# Altium PCB aig2_power.PcbDoc
Units mm, origin at the board's own origin, x right, y up, seen from the top; angles counter-clockwise.
Board outline 80 x 80 mm, 2 copper layers (Top Layer, Bottom Layer), stack 1.571 mm thick; 62 components, 47 nets, 339 pads, 70 vias.
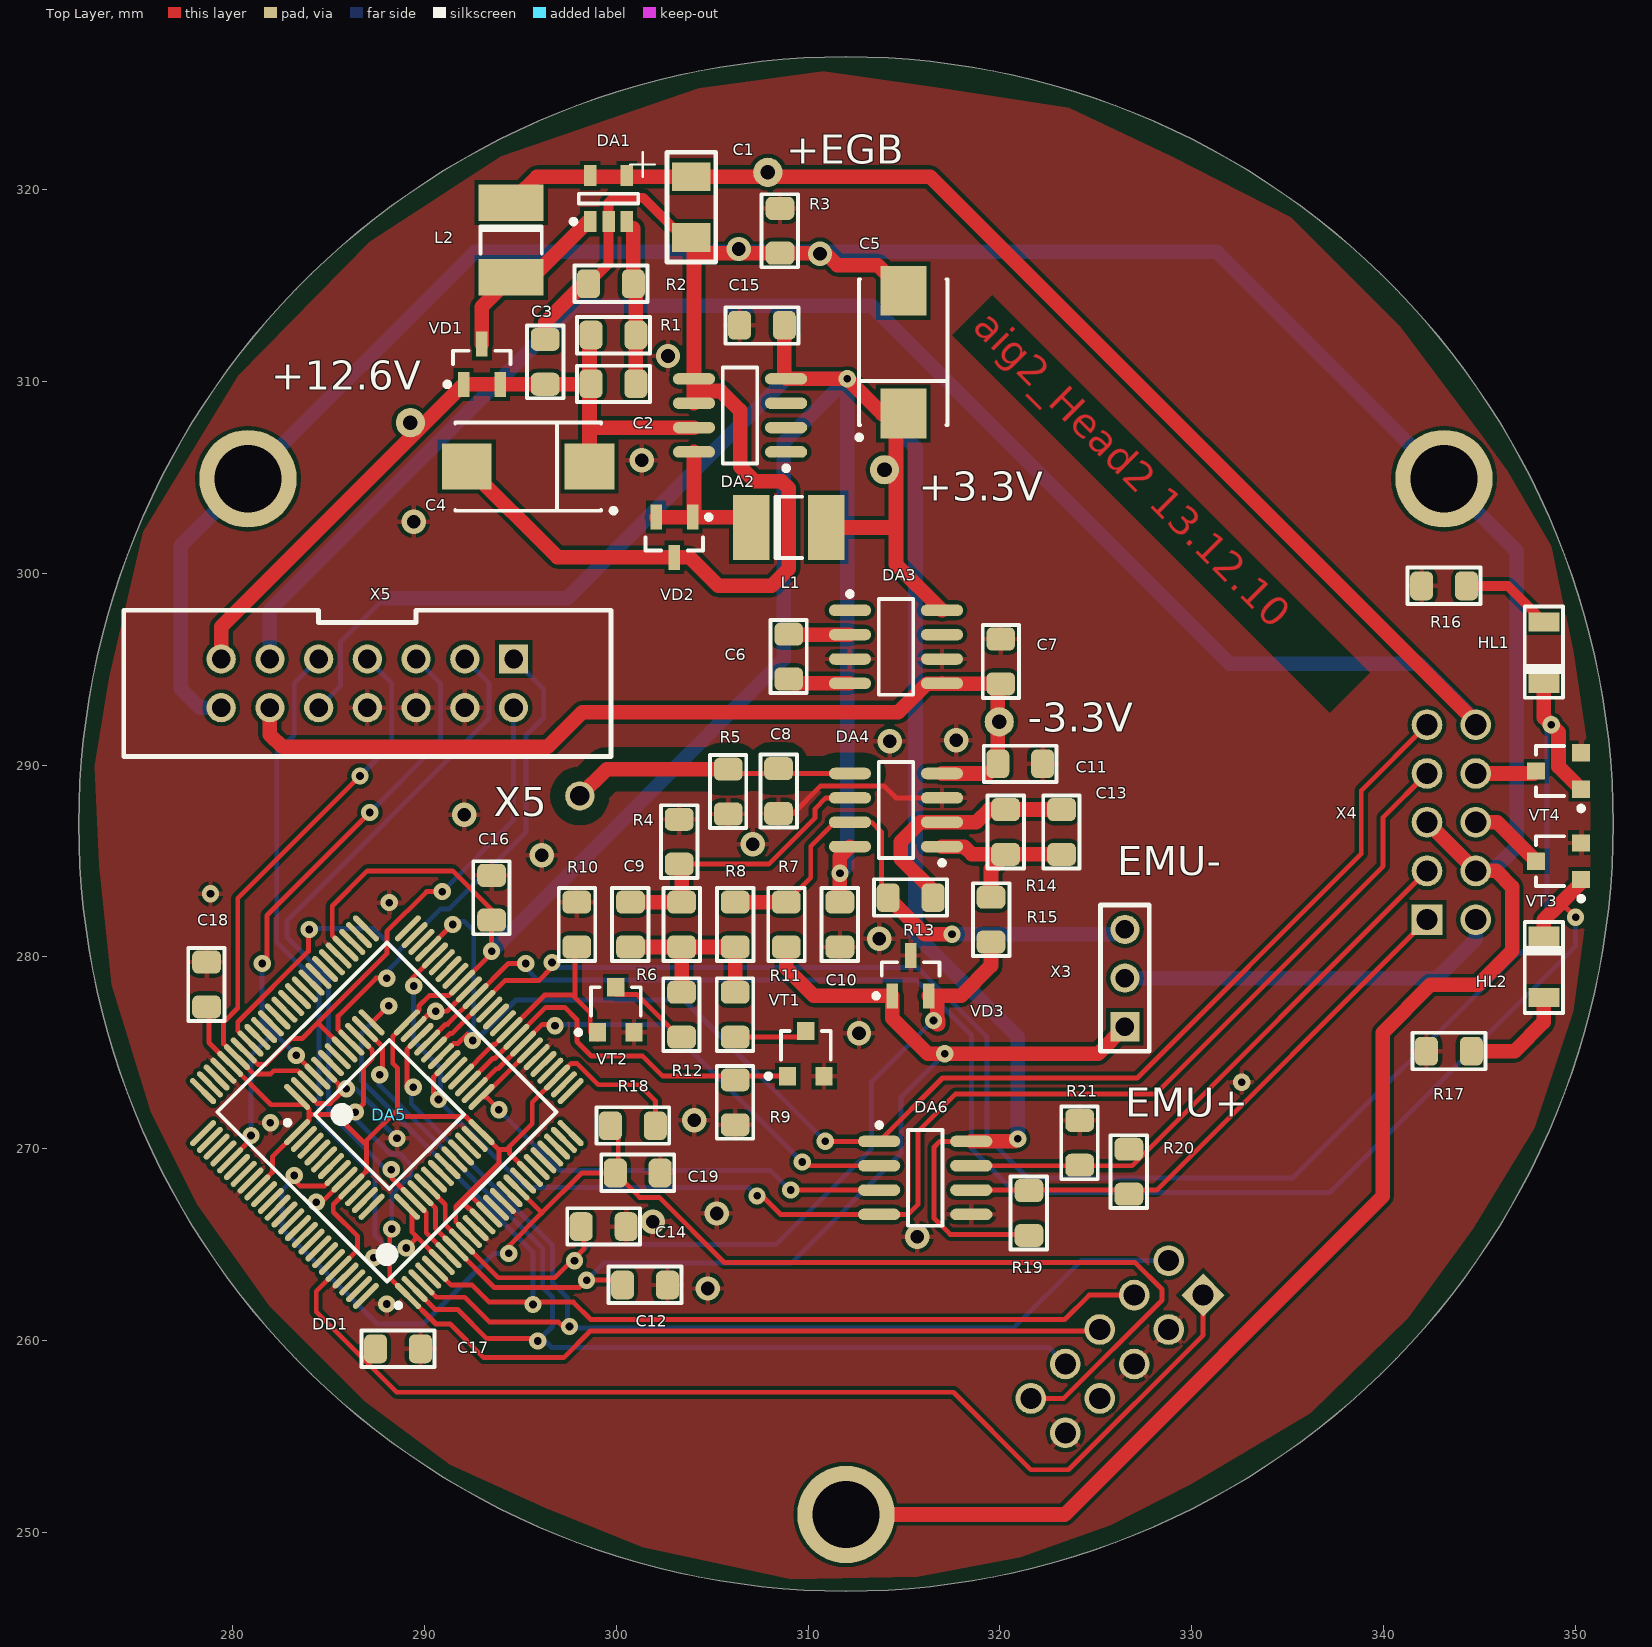
[diagram p0: Top Layer view]
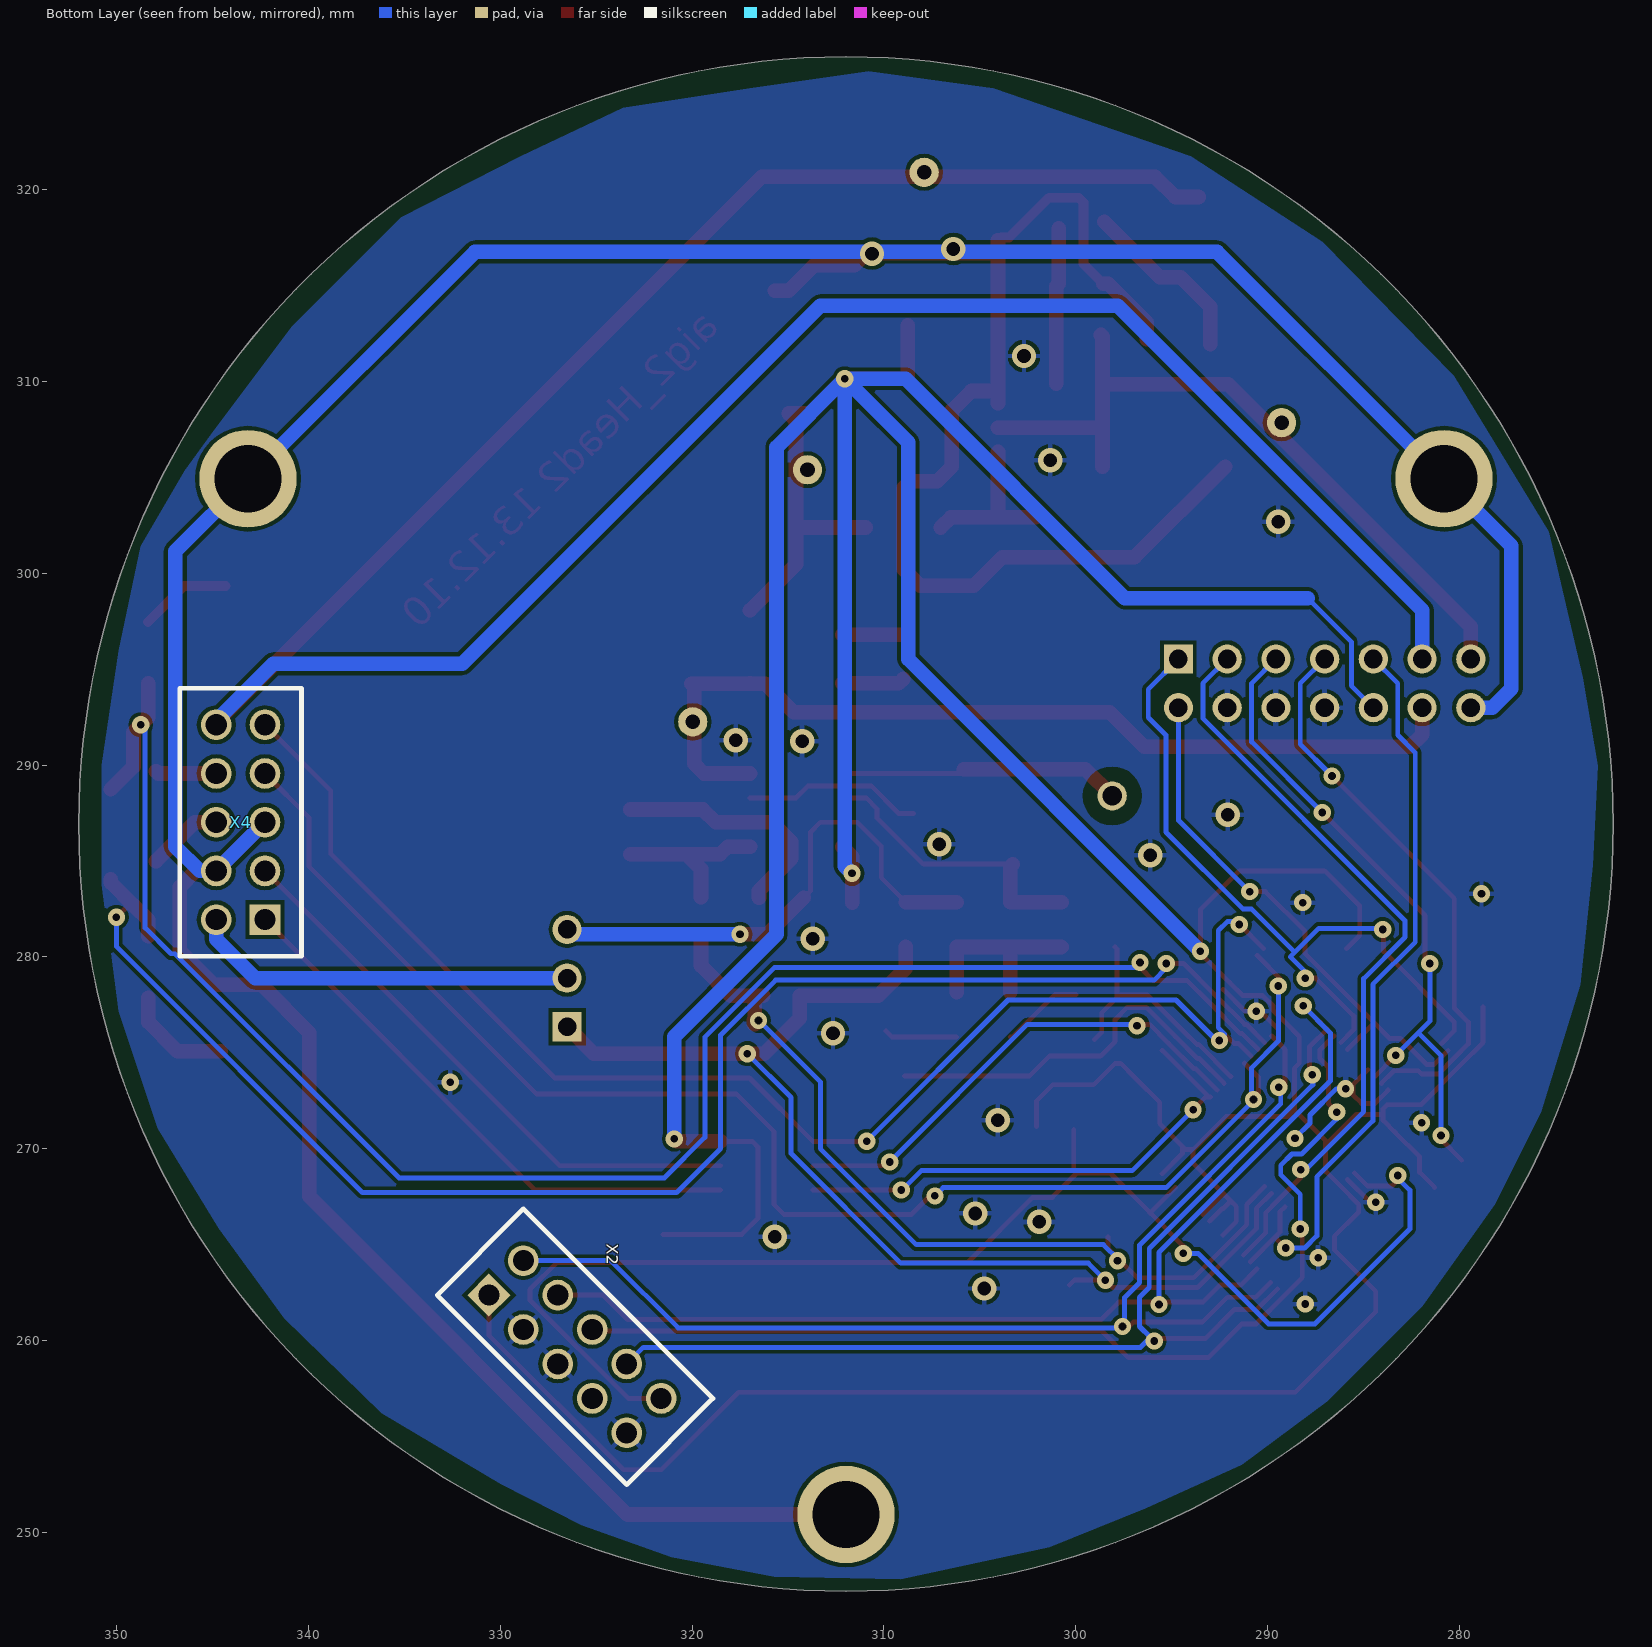
[diagram p1: Bottom Layer view, seen from below]
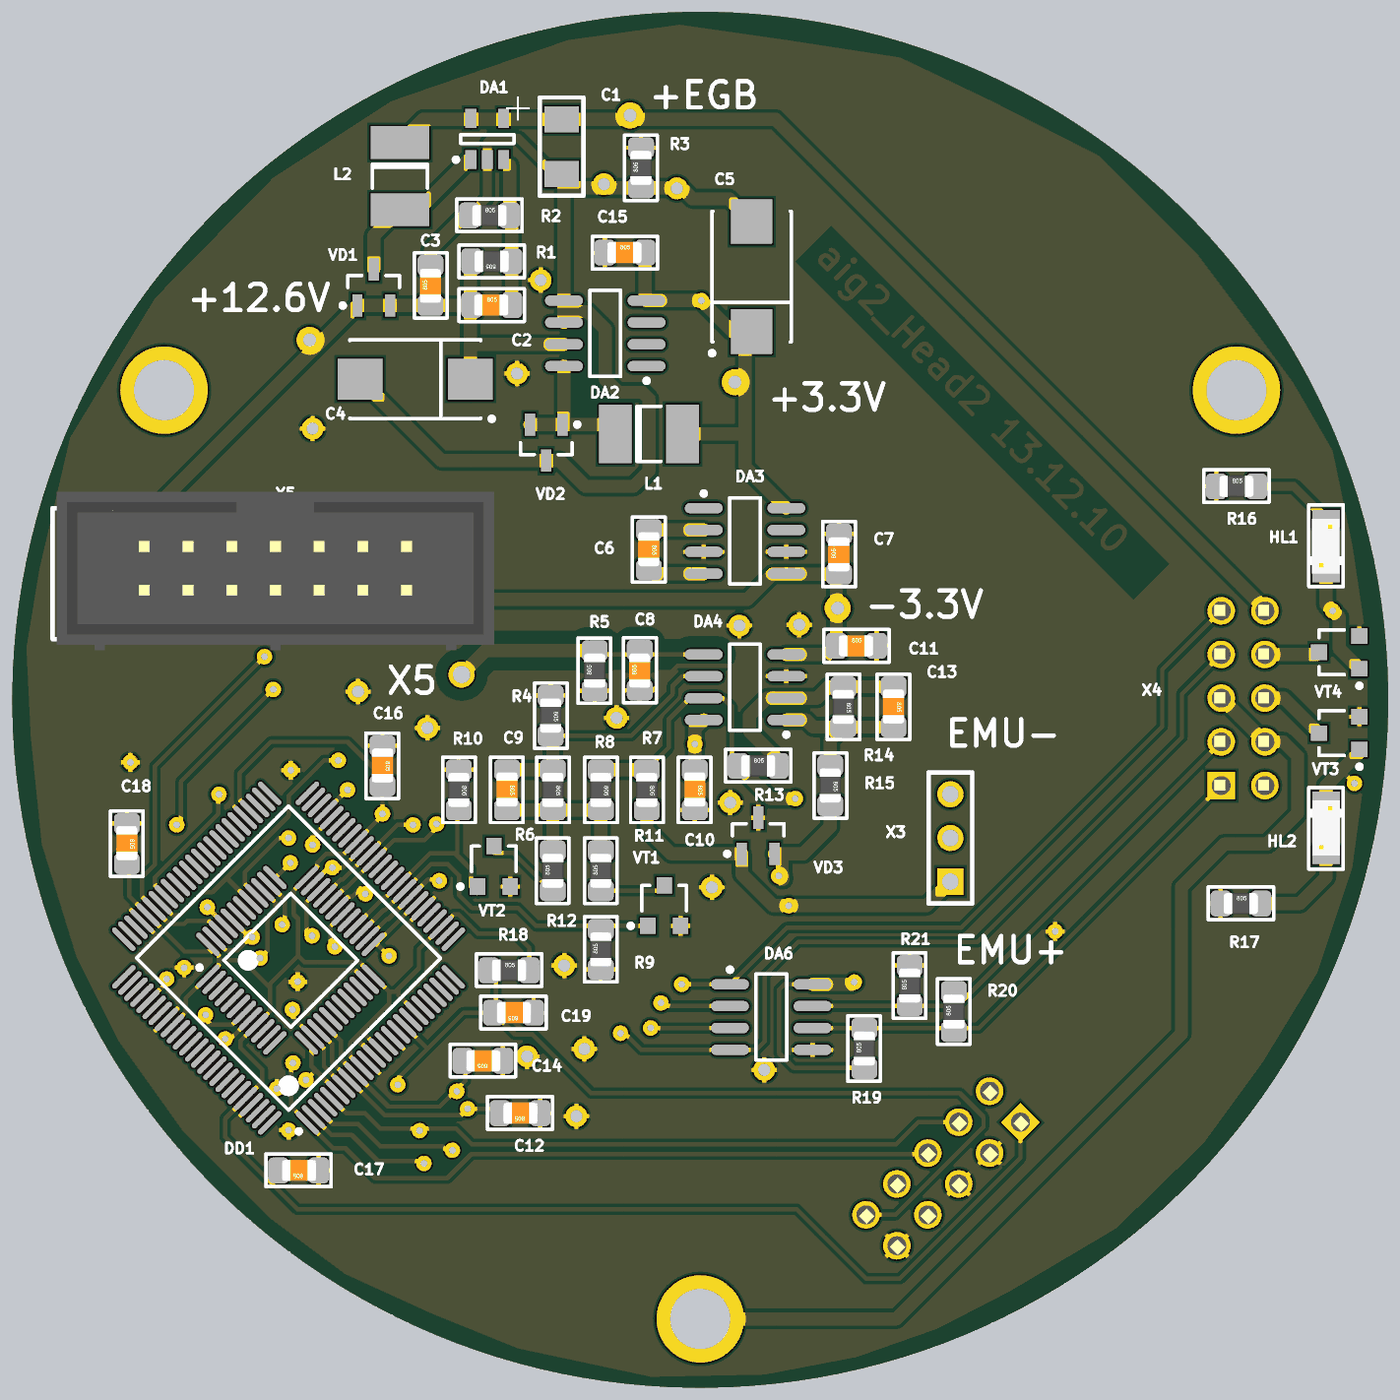
[diagram p2: 3D render of the assembled board from above, using the file's embedded part models]

## Layer stack, top to bottom
Top Layer: signal copper 0.0356
Dielectric: core 1.5, FR-4, Dk 4.8
Bottom Layer: signal copper 0.0356

## Board outline
271.974,286.927 ccw(c311.974,286.927) 311.974,246.927 ccw(c311.974,286.927) 351.974,286.927 ccw(c311.974,286.927) 311.974,326.927 ccw(c311.974,286.927)

## Design rules (kind name [scope] priority, off if disabled: settings)
Clearance EMU_IN [InNet('EMU_IN')] p1: gap=0.762
Clearance [All] p2: gap=0.203
DiffPairsRouting [All] p1: maxlimit=0.254 minlimit=0.254 mostfreqgap=0.254 maxuncoupledlength=12.7
MinimumSolderMaskSliver [All] p1 off: minsoldermaskwidth=0.254
PolygonConnect [All] p1: connectstyle=Relief reliefconductorwidth=0.254 reliefentries=4 polygonreliefangle="90 Angle"
RoutingVias [All] p1: holewidth=1.016 width=0.508 viastyle="Through Hole" minholewidth=0.813 minwidth=0.305 maxholewidth=1.27 maxwidth=0.508
ShortCircuit [InNet('GND_EXT') vs InNet('GND')] p1: allowed=FALSE
SilkToSilkClearance [All] p1 off: silktosilkclearance=0.254
SilkscreenOverComponentPads [All] p1 off: minsilkscreentomaskgap=0.254
SolderMaskExpansion [All] p1: expansion=0.102
Width [All] p1: maxlimit=0.762 minlimit=0.254 preferedwidth=0.508
23 further rules are at their usual default settings.

## Classes and differential pairs
differential pair RS485: +RS485_P -RS485_N

## Components (designator, comment, footprint, x,y, rotation, side; value= is the part's Value field where it differs from the comment)
C1 "CAPASITOR A" "CAPASITOR A" 303.911,320.675 r270 top
C2 "C0805" CC0805 299.847,309.88 r0 top
C3 "C0805" CC0805 296.291,311.023 r90 top
C4 "T492D" D 295.402,305.562 r180 top
C5 "T492D" D 314.96,311.531 r90 top
C6 "C0805" CC0805 308.991,295.656 r270 top
C7 "C0805" CC0805 320.04,295.402 r90 top
C8 "C0805" CC0805 308.458,288.646 r90 top
C9 "C0805" CC0805 300.736,281.686 r270 top
C10 "C0805" CC0805 311.658,281.686 r270 top
C11 "C0805" CC0805 321.056,290.068 r0 top
C12 "C0805" CC0805 301.498,262.89 r180 top
C13 "C0805" CC0805 323.215,286.512 r270 top
C14 "C0805" CC0805 299.339,265.938 r180 top
C15 "C0805" CC0805 307.594,312.928 r0 top
C16 "C0805" CC0805 293.497,283.083 r270 top
C17 "C0805" CC0805 288.62,259.563 r180 top
C18 "C0805" CC0805 278.638,278.562 r270 top
C19 "C0805" CC0805 301.117,268.732 r180 top
DA1 "LT3460ES5" S5-T_N 299.593,319.532 r90 top
DA2 "LM2594M-3.3" M08A_N 306.451,308.229 r180 top
DA3 "LMC7660IM" M08A_N 314.579,296.164 r0 top
DA4 "LMC6042IM" M08A_N 314.579,287.655 r180 top
DA5 "STM32F100C8" LQFP48_N 288.163,271.78 r45 top
DA6 "MAX485ESA" NSO8_N 316.103,268.478 r0 top
DD1 "LPC1768FBD100" SOT407-1_N 288.036,271.907 r135 top
HL1 "LED0805" led1206 348.361,294.259 r90 top
HL2 "LED0805" led1206 348.361,281.076 r270 top
L1 "LQH43CN101K" 1812 308.991,302.387 r0 top
L2 "LQH43CN220K" 1812 294.513,317.373 r270 top
R1 "" RR0805 299.847,312.42 r0 top
R2 "" RR0805 299.72,315.087 r180 top
R3 "" RR0805 308.534,317.856 r270 top
R4 "" RR0805 303.276,286.004 r90 top
R5 "" RR0805 305.835,288.618 r270 top
R6 "" RR0805 303.403,281.686 r90 top
R7 "" RR0805 308.864,281.686 r90 top
R8 "" RR0805 306.197,281.686 r90 top
R9 "" RR0805 306.197,272.415 r270 top
R10 "" RR0805 297.942,281.686 r90 top
R11 "" RR0805 306.197,276.987 r270 top
R12 "" RR0805 303.403,276.987 r270 top
R13 "" RR0805 315.341,283.083 r180 top
R14 "" RR0805 320.294,286.512 r90 top
R15 "" RR0805 319.532,281.94 r90 top
R16 "" RR0805 343.154,299.339 r180 top
R17 "" RR0805 343.408,275.082 r180 top
R18 "" RR0805 300.863,271.196 r180 top
R19 "" RR0805 321.513,266.649 r270 top
R20 "" RR0805 326.722,268.802 r270 top
R21 "" RR0805 324.155,270.307 r270 top
VD1 "BAT54A" SOT23_N 292.989,310.896 r90 top
VD2 "BAT54A" SOT23_N 303.022,301.879 r270 top
VD3 "BAT54A" SOT23_N 315.341,279.019 r90 top
VT1 "IRLML2803" SOT-23 309.88,274.955 r0 top
VT2 "IRLML2803" SOT-23 299.974,277.241 r0 top
VT3 "IRLML2803" SOT-23 349.123,284.988 r90 top
VT4 "IRLML2803" SOT-23 349.123,289.687 r90 top
X2 "IDC10M" idc10_2 330.592,262.367 r135 bottom
X3 "JP3" "PLS-3 2.54" 326.517,276.352 r90 top
X4 "IDC10M" idc10_2 342.265,281.94 r0 bottom
X5 "IDC14M" IDC14M 294.64,295.529 r180 top

## Footprints (in the part's own frame and the unit in brackets; to place one, negate y for a bottom-side part, rotate by r counter-clockwise, add the part's x,y. Pads: shape width x height; smd on the part's side, far side on the other; paste and mask are expansions set on the pad)
1812 [mm] "Chip Capacitor; Body 4.5 x 3.2 mm (LxW typ)"
  rect 1.9x3.4 smd: 1(-1.95,0) 2(1.95,0)
  silkscreen extent -0.7,-1.6 0.7,1.6
"CAPASITOR A" [mm]
  rect 1.5x2 smd: 1(0,0) 2(3.175,0)
  silkscreen extent -1.27,-3.17 4.44,1.27
CC0805 [mm]
  rrect50% 1.2x1.5 smd: 1(-1.17,0) 2(1.17,0)
  silkscreen extent -1.9,-0.96 1.9,0.94, body extent -1.03,-0.62 0.97,0.63, height 0.78
D [mm] "Capacitor, SM Tantalum; Body 7.3 x 4.3 mm (LxW typ)"
  rect 2.6x2.4 smd: 1(-3.2,0) 2(3.2,0)
  silkscreen extent -4.58,-2.3 3.8,2.42
idc10_2 [mm]
  rect 1.6x1.6 hole 1.1: 1(0,0)
  round 1.6 hole 1.1: 2(2.54,0) 3(0,-2.54) 4(2.54,-2.54) 5(0,-5.08) 6(2.54,-5.08) 7(0,-7.62) 8(2.54,-7.62) 9(0,-10.16) 10(2.54,-10.16)
  silkscreen extent -1.9,-12.06 4.45,1.9, body extent -3.26,-15.29 5.94,5.07, height 8.84
IDC14M [mil]
  rect 60x60 hole 38: 1(0,0)
  round 60 hole 38: 2(0,100) 3(100,0) 4(100,100) 5(200,0) 6(200,100) 7(300,0) 8(300,100) 9(400,0) 10(400,100) 11(500,0) 12(500,100) 13(600,0) 14(600,100)
  silkscreen extent -200,-100 800,200, body extent -211,-137 791,225, height 110
led1206 [mm]
  rect 1x1.6 smd: 1(0,0) 2(3.2,0)
  silkscreen extent -0.75,-1 4,1, body extent 0,-0.79 3.2,0.81, height 1.11
LQFP48_N [mm] "Thin QFP, 48-Leads, Body 7x7mm, Pitch 0.5mm, IPC Medium Density"
  oval 1.8x0.3 smd: 1(-4.05,2.75) 2(-4.05,2.25) 3(-4.05,1.75) 4(-4.05,1.25) 5(-4.05,0.75) 6(-4.05,0.25) 7(-4.05,-0.25) 8(-4.05,-0.75) 9(-4.05,-1.25) 10(-4.05,-1.75) 11(-4.05,-2.25) 12(-4.05,-2.75) 25(4.05,-2.75) 26(4.05,-2.25) 27(4.05,-1.75) 28(4.05,-1.25) 29(4.05,-0.75) 30(4.05,-0.25) 31(4.05,0.25) 32(4.05,0.75) 33(4.05,1.25) 34(4.05,1.75) 35(4.05,2.25) 36(4.05,2.75)
  oval 0.3x1.8 smd: 13(-2.75,-4.05) 14(-2.25,-4.05) 15(-1.75,-4.05) 16(-1.25,-4.05) 17(-0.75,-4.05) 18(-0.25,-4.05) 19(0.25,-4.05) 20(0.75,-4.05) 21(1.25,-4.05) 22(1.75,-4.05) 23(2.25,-4.05) 24(2.75,-4.05) 37(2.75,4.05) 38(2.25,4.05) 39(1.75,4.05) 40(1.25,4.05) 41(0.75,4.05) 42(0.25,4.05) 43(-0.25,4.05) 44(-0.75,4.05) 45(-1.25,4.05) 46(-1.75,4.05) 47(-2.25,4.05) 48(-2.75,4.05)
  silkscreen extent -4.17,-2.75 2.75,3.57, body extent -3.5,-3.5 3.5,3.5, height 1.6
M08A_N [mm] "SOIC, 8-Leads, Body 4.9x3.9mm, Pitch 1.27mm, IPC Medium Density"
  oval 2.2x0.6 smd: 1(-2.4,1.905) 2(-2.4,0.635) 3(-2.4,-0.635) 4(-2.4,-1.905) 5(2.4,-1.905) 6(2.4,-0.635) 7(2.4,0.635) 8(2.4,1.905)
  silkscreen extent -2.53,-2.5 0.9,2.88, body extent -2,-2.5 2,2.5, height 1.75
NSO8_N [mm] "SOIC, 8-Leads, Body 4.9x3.9mm, Pitch 1.27mm, IPC Medium Density"
  oval 2.2x0.6 smd: 1(-2.4,1.905) 2(-2.4,0.635) 3(-2.4,-0.635) 4(-2.4,-1.905) 5(2.4,-1.905) 6(2.4,-0.635) 7(2.4,0.635) 8(2.4,1.905)
  silkscreen extent -2.52,-2.5 0.9,2.88, body extent -2,-2.5 2,2.5, height 1.75
"PLS-3 2.54" [mil]
  rect 60x60 hole 38: 1(0,0)
  round 60 hole 38: 2(100,0) 3(200,0)
  silkscreen extent -50,-50 250,50
RR0805 [mm]
  rrect50% 1.2x1.5 smd: 1(-1.17,0) 2(1.17,0)
  silkscreen extent -1.9,-0.96 1.9,0.94, body extent -1,-0.62 1,0.62, height 0.78
S5-T_N [mm] "SOT23, 5-Leads, Body 3x1.6mm, Pitch 0.95mm, Lead Span 2.8mm, IPC Medium Density"
  rect 1.1x0.65 smd: 1(-1.2,0.95) 2(-1.2,0) 3(-1.2,-0.95) 4(1.2,-0.95) 5(1.2,0.95)
  silkscreen extent -1.32,-1.55 0.25,1.95, body extent -0.9,-1.55 0.9,1.55, height 1
SOT23_N [mm] "SOT23, 3-Leads, Body 2.9x1.3mm, Pitch 0.95mm, Lead Span 2.3mm, IPC Medium Density"
  rect 1.3x0.6 smd: 1(-1.05,0.95) 2(-1.05,-0.95) 3(1.05,0)
  silkscreen extent -1.17,-1.5 0.7,1.92, body extent -0.7,-1.5 0.7,1.5, height 1.1
SOT407-1_N [mm] "Thin QFP, 100-Leads, Body 14x14mm, Pitch 0.5mm, IPC Medium Density"
  oval 1.8x0.3 smd: 1(-7.55,6) 2(-7.55,5.5) 3(-7.55,5) 4(-7.55,4.5) 5(-7.55,4) 6(-7.55,3.5) 7(-7.55,3) 8(-7.55,2.5) 9(-7.55,2) 10(-7.55,1.5) 11(-7.55,1) 12(-7.55,0.5) 13(-7.55,0) 14(-7.55,-0.5) 15(-7.55,-1) 16(-7.55,-1.5) 17(-7.55,-2) 18(-7.55,-2.5) 19(-7.55,-3) 20(-7.55,-3.5) 21(-7.55,-4) 22(-7.55,-4.5) 23(-7.55,-5) 24(-7.55,-5.5) 25(-7.55,-6) 51(7.55,-6) 52(7.55,-5.5) 53(7.55,-5) 54(7.55,-4.5) 55(7.55,-4) 56(7.55,-3.5) 57(7.55,-3) 58(7.55,-2.5) 59(7.55,-2) 60(7.55,-1.5) 61(7.55,-1) 62(7.55,-0.5) 63(7.55,0) 64(7.55,0.5) 65(7.55,1) 66(7.55,1.5) 67(7.55,2) 68(7.55,2.5) 69(7.55,3) 70(7.55,3.5) 71(7.55,4) 72(7.55,4.5) 73(7.55,5) 74(7.55,5.5) 75(7.55,6)
  oval 0.3x1.8 smd: 26(-6,-7.55) 27(-5.5,-7.55) 28(-5,-7.55) 29(-4.5,-7.55) 30(-4,-7.55) 31(-3.5,-7.55) 32(-3,-7.55) 33(-2.5,-7.55) 34(-2,-7.55) 35(-1.5,-7.55) 36(-1,-7.55) 37(-0.5,-7.55) 38(0,-7.55) 39(0.5,-7.55) 40(1,-7.55) 41(1.5,-7.55) 42(2,-7.55) 43(2.5,-7.55) 44(3,-7.55) 45(3.5,-7.55) 46(4,-7.55) 47(4.5,-7.55) 48(5,-7.55) 49(5.5,-7.55) 50(6,-7.55) 76(6,7.55) 77(5.5,7.55) 78(5,7.55) 79(4.5,7.55) 80(4,7.55) 81(3.5,7.55) 82(3,7.55) 83(2.5,7.55) 84(2,7.55) 85(1.5,7.55) 86(1,7.55) 87(0.5,7.55) 88(0,7.55) 89(-0.5,7.55) 90(-1,7.55) 91(-1.5,7.55) 92(-2,7.55) 93(-2.5,7.55) 94(-3,7.55) 95(-3.5,7.55) 96(-4,7.55) 97(-4.5,7.55) 98(-5,7.55) 99(-5.5,7.55) 100(-6,7.55)
  silkscreen extent -7.67,-6.25 6.25,6.82, body extent -7,-7 7,7, height 1.6
SOT-23 [mm] "SOT-23; 3 Leads; Body 3.1 x 2.5 mm, inc. leads (LxW max)"
  rect 0.9x0.95 smd: 1(-0.95,-1.175) 2(0.95,-1.175) 3(0,1.175)
  silkscreen extent -2.07,-1.3 1.3,1.18

## Part data
C2 C3 C6 C7 C8 C9 C10 C11 C12 C13 C14 C15 C16 C17 C18 C19: "Ceramic Chip Capacitor - Standard"
C4 C5: "Solid Tantalum Chip Capacitor, T492 Series - CWR11 Style Per Mil-PRF-55365/8"
DA1: library part LT1931AES5, "2.2MHz Inverting Current Mode DC/DC Converter"
DA2: "SIMPLE SWITCHER Power Converter 150 KHz 0.5A Step-Down Voltage Regulator"
DA3: "Switched Capacitor Voltage Converter"
DA4: "CMOS Dual Micropower Operational Amplifier"
DA5: library part STM32F101C6T6, "STM32 ARM-based 32-bit MCU with 32 Kbytes Flash, 48-pin LQFP, Industrial Temperature"
DA6: "Low-Power, Slew-Rate-Limited RS-485/RS-422 Transceiver"
DD1: library part LPC2364FBD100, "ARM7 16/32-Bit Microcontroller, 128KB Flash, 34KB RAM, 4 Channel CAN, 100-Lead LQFP"
L1 L2: library part CDRH127, "Дроссель"
R1 R2 R3 R4 R5 R6 R7 R8 R9 R10 R11 R12 R13 R14 R15 R16 R17 R18 R19 R20 R21: library part R_0805, "R_0805"
VD1 VD2 VD3: "Schottky Barrier Double Diode"
VT1 VT2 VT3 VT4: "HEXFET Power MOSFET"
X2 X4: library part "09 18 110 9621", "Flat Cable Connector (IDC), PCB Transition Connector, 2 Rows, Solder Pin, 10 Contacts"

## Free pads (board coordinates)
  round 5.08 hole 3.5: 0(280.797,304.927) 0(311.974,250.927) 0(343.151,304.927)
  round 1.524 hole 1.016: 0(298.094,288.392)
  round 1.524 hole 0.762: 0(313.983,305.396) 1(319.964,292.252) 2(307.899,320.904) 3(289.264,307.849)

## Via types
v1: diameter 0.9, hole 0.4, Top Layer to Bottom Layer, 53 vias
v2: diameter 1.27, hole 0.711, Top Layer to Bottom Layer, 17 vias

## Nets (pads, with @x,y where several pads share a name; then routed paths per layer and width w, separated by ;. In a path a pad name is that pad's centre, name@x,y a point inside that pad or via, vN(x,y) a via of type N, cw(c..) or ccw(c..) an arc to the next point about the centre after c; other vN are vias at no path point)
2F: DA5.46 DD1.70 X5.7 | length 29.6
  Top Layer w0.254: DA5.46 283.402,274.066 282.143,274.066 281.965,273.888 281.105,273.888 DD1.70 279.527,275.466 279.527,276.6 280.264,277.336 280.264,283.058 v1(286.639,289.433)
  Bottom Layer w0.254: v1@286.766,289.56 288.29,291.084 288.29,294.259 X5.7
+3.3V: C5.1 C10.1 C15.2 C16.2 C17.2 C18.2 DA2.4 DA3.8 DA4.8 DA5.1 DA5.9 DA5.24 DA5.36 DA5.48 DA6.8 DD1.10 DD1.12 DD1.13 DD1.19 DD1.28 DD1.42 DD1.54 DD1.71 DD1.84 DD1.96 L1.2 pad.0@313.983,305.396 R18.1 R19.2 X2.1 X5.10 | length 324.9
  Top Layer w0.254: C18.2@278.765,277.392 278.765,275.521 DD1.71 281.998,272.288 283.766,272.288 283.972,272.082 283.972,271.78 ; DD1.84 282.067,268.766 282.067,269.573 DA5.1 283.972,271.478 283.972,271.78 ; DD1.54 285.191,281.116 285.191,282.651 287.02,284.48 291.465,284.48 293.497,282.448 C16.2 v1(293.497,280.289) ; 286.855,270.294 285.369,271.78 283.972,271.78 ; DD1.10 291.63,266.192 291.63,266.992 291.909,267.272 ; 292.354,267.589 DD1.13 ; DD1.12 292.354,266.882 292.299,266.882 291.909,267.272 ; DD1.19 294.438,269.748 294.438,270.129 ; R18.1@302.033,271.145 R18.1 302.033,272.5 301.202,273.331 299.058,273.331 297.942,274.447 297.647,274.447 DD1.28 295.618,272.418 295.618,271.31 294.438,270.129 ; DA6.8 316.865,270.383 316.56,270.078 316.56,266.37 317.4,265.53 R19.2@321.513,265.53 ; X2.1 330.592,260.282 323.573,253.263 321.615,253.263 317.576,257.302 288.544,257.302 284.353,261.493 284.353,262.567 DD1.96 286.512,264.726 286.512,265.43 285.242,266.7 285.242,267.091 DA5.9 286.969,268.818 286.969,270.408 288.595,272.034 ; 288.595,272.034 288.95,271.678 292.154,271.678 DA5.24 293.878,269.954 ; 288.595,272.034 288.595,274.193 288.341,274.447 288.341,275.847 DA5.36 289.712,277.218 289.712,277.444 290.246,277.978 291.278,277.978 DD1.42 v1@293.497,280.196 ; 291.909,267.272 293.878,269.24 293.878,269.954 ; v1@293.497,280.196 v1@293.59,280.289 ; v1@293.497,280.196 v1(293.497,280.289) ; v1(293.497,280.289) v1@293.59,280.289 ; v1@293.59,280.289 293.624,280.289 293.607,280.306 v1@293.59,280.289 ; 293.878,269.954 294.263,269.954 294.438,270.129
  Top Layer w0.762: C15.2 308.764,310.221 DA2.4 v1(312.039,310.134) 313.842,308.331 C5.1 314.579,307.95 314.579,302.387 ; L1.2 314.579,302.387 ; C10.1@311.658,282.829 C10.1 v1(311.658,284.353) 311.658,285.229 DA4.8 ; DA3.8 314.579,300.469 314.579,302.387 ; DA6.8 320.802,270.383 v1(320.929,270.51)
  Bottom Layer w0.254: X5.10 285.623,294.132 285.623,296.418 287.909,298.704
  Bottom Layer w0.762: 287.909,298.704 297.434,298.704 308.864,310.134 v1(312.039,310.134) ; v1(293.497,280.289) 308.737,295.529 308.737,306.832 v1(312.039,310.134) ; v1(311.658,284.353) 312.039,284.734 v1(312.039,310.134) ; v1(320.929,270.51) 320.929,275.844 315.595,281.178 315.595,306.578 v1(312.039,310.134)
+12.6V: C2.1 C3.1 C4.1 DA2.7 pad.3 R1.1 VD1.1 VD1.2 X5.13 | length 38.4
  Top Layer w0.762: X5.13 279.4,297.207 VD1.1 VD1.2 C2.1@298.577,309.846 ; C4.1 298.602,307.594 ; R1.1 298.602,312.345 298.602,307.594 ; DA2.7 298.602,307.594
+EGB: C1.1 DA1.4 DA1.5 L2.1 pad.2 X4.10 X5.11 | length 144.7
  Top Layer w0.762: L2.1@293.583,319.618 294.808,319.618 295.865,320.675 C1.1 316.357,320.675 344.805,292.227 X4.10
  Bottom Layer w0.762: X5.11 281.94,298.069 297.815,313.944 313.309,313.944 331.978,295.275 341.833,295.275 344.805,292.303 X4.10
-3.3V: C7.1 C11.1 DA3.5 DA4.4 pad.1 X5.12 | length 48.5
  Top Layer w0.762: X5.12 281.94,291.592 282.575,290.957 296.418,290.957 298.221,292.76 314.706,292.76 316.178,294.232 DA3.5@317.006,294.232 ; DA4.4 319.378,289.56 C11.1 319.886,294.078 C7.1 DA3.5@317.006,294.232 ; DA3.5 DA3.5@317.006,294.232
CONT2ASS: DA5.40 DD1.68 X5.1 | length 40.1
  Top Layer w0.254: DD1.68 280.264,276.144 280.264,276.606 283.942,280.284 283.942,281.402 283.894,281.494 283.82,281.635 283.921,281.534 283.921,281.508 283.992,281.437 v1(283.992,281.427) ; DA5.40 285.496,276.215 285.496,276.911 287.477,278.892 v1(288.036,278.892) v1@288.036,278.978
  Bottom Layer w0.254: v1(283.992,281.427) 283.992,281.437 283.921,281.508 283.921,281.534 283.82,281.635 283.948,281.597 284.035,281.57 284.328,281.483 287.325,281.483 288.62,280.187 ; v1(288.036,278.892) 288.036,279.222 288.811,279.997 288.62,280.187 ; X5.1 296.215,293.954 296.215,292.481 295.3,291.567 295.3,286.512 291.288,282.5 290.837,282.5 288.62,280.283 288.62,280.187
CONT2U: DA5.41 DD1.69 X5.2 | length 28.2
  Top Layer w0.254: DD1.69 281.304,274.396 281.711,274.396 283.058,275.742 283.616,275.742 284.455,276.581 ; DA5.41 284.455,276.549 284.455,276.581 ; v1(290.928,283.403) 290.109,283.403 288.036,281.33 288.036,280.162 284.455,276.581
  Bottom Layer w0.254: v1(290.928,283.403) 294.64,287.115 X5.2
DE: DA5.25 DA6.3 DD1.32 | length 26.2
  Top Layer w0.254: DA5.25 DA5.25@293.071,272.699 ; v1(293.878,272.034) 293.213,272.699 DA5.25@293.071,272.699 ; DD1.32 DA5.25@293.071,272.699 ; v1(309.093,267.843) DA6.3
  Bottom Layer w0.254: v1(293.878,272.034) 297.053,268.859 308.051,268.859 309.067,267.843 v1(309.093,267.843)
EASS: DA5.13 DD1.6 X5.9 | length 39.5
  Top Layer w0.254: v1(289.052,264.82) 289.536,265.305 289.536,265.457 ; DA5.13 289.35,266.704 289.35,265.643 289.536,265.457 ; DD1.6 289.536,265.457
  Bottom Layer w0.254: X5.9 283.21,294.259 283.21,291.567 282.296,290.652 282.296,280.772 284.505,278.562 284.505,271.45 287.426,268.529 287.426,265.455 288.061,264.82 v1(289.052,264.82)
EHV: DA5.14 DD1.7 X5.3 | length 39.4
  Top Layer w0.254: v1(288.265,268.91) 288.265,268.496 DA5.14 290.093,266.668 290.093,265.607 DD1.7
  Bottom Layer w0.254: v1@288.011,268.91 284.988,271.932 284.988,278.867 282.829,281.026 282.829,281.889 293.37,292.43 293.37,294.259 X5.3
EMU1: C12.2 DA5.15 DD1.8 R7.1 VD3.1 X3.1 | length 60.6
  Top Layer w0.254: DA5.15 290.576,266.892 290.576,265.831 DD1.8 293.644,262.763 298.069,262.763 v1(298.45,263.144) 300.074,263.144 C12.2 ; v1(317.119,274.955) v1@317.5,274.955
  Top Layer w0.762: R7.1 308.864,279.4 310.295,277.969 VD3.1 314.391,276.794 316.23,274.955 v1(317.119,274.955) ; v1@317.5,274.955 325.12,274.955 X3.1
  Bottom Layer w0.254: v1(298.45,263.144) 299.339,264.033 309.118,264.033 314.833,269.748 314.833,272.669 v1(317.119,274.955)
EMU2: C14.2 DA5.16 DD1.9 R15.1 VD3.2 | length 44.9
  Top Layer w0.254: DA5.16 291.084,267.091 291.084,266.031 DD1.9 293.844,263.271 296.799,263.271 298.323,264.795 C14.2@298.323,265.403
  Top Layer w0.762: VD3.2 316.738,277.969 ; v1(316.535,276.682) v1@316.738,276.682 ; R15.1 319.532,279.527 317.974,277.969 316.738,277.969 ; v1@316.738,276.682 316.738,277.969 ; v1@316.738,276.682 316.738,276.479 316.789,276.479 316.789,276.682 v1@316.738,276.682
  Bottom Layer w0.254: v1@297.764,264.211 298.552,264.998 308.305,264.998 313.309,270.002 313.309,273.482 v1@316.408,276.581
  other v1: 297.815,264.16
EMU-: DA4.7 R7.2 R8.2 R13.2 X3.3 | length 27.3
  Top Layer w0.254: R7.2 310.134,284.126 310.134,285.775 311.379,287.02 DA4.7 313.309,287.02 313.817,286.512 313.817,283.437 R13.2
  Top Layer w0.762: R8.2 R7.2 ; R13.2 316.076,281.178 v1(317.5,281.178)
  Bottom Layer w0.762: v1(317.5,281.178) 326.263,281.178 X3.3
EMU_IN: C8.2 DA4.5 pad.0@298.094,288.392 R5.1 | length 14.8
  Top Layer w0.254: R5.1 306.063,289.56 DA4.5
  Top Layer w0.762: pad.0@298.094,288.392 299.491,289.788 R5.1
F: DA5.45 DD1.80 X5.5 | length 35.1
  Top Layer w0.254: DD1.80 280.949,270.477 v1(280.949,270.688) v1@280.949,270.713 ; v1@281.788,279.756 281.788,282.169 v1(287.147,287.528) ; v1@283.337,274.838 DA5.45
  Bottom Layer w0.254: v1(280.949,270.688) 280.949,274.853 282.136,276.04 ; v1(281.534,279.654) 281.534,276.642 282.136,276.04 ; v1@283.108,275.057 283.108,274.955 283.21,274.853 283.327,274.853 283.327,274.864 v1(283.312,274.864) 282.136,276.04 ; v1(287.147,287.528) 290.83,291.211 290.83,294.259 X5.5
GND: C7.2 C8.1 C10.2 C11.2 C12.1 C14.1 C15.1 C16.1 C17.1 C18.1 C19.1 DA3.3 DA3.6 DA4.3 DA5.8 DA5.23 DA5.35 DA5.44 DA5.47 DA6.5 DD1.11 DD1.15 DD1.31 DD1.41 DD1.55 DD1.72 DD1.83 DD1.97 R3.1 R4.2 R5.2 R9.2 R10.2 R16.2 R17.2 R21.1 VD3.3 VT1.2 VT2.2 VT3.2 VT4.2 X2.3 X2.5 X2.9 X5.4 X5.6 X5.8 | length 23.1
  Top Layer w0.254: DA5.47 284.397,272.364 285.09,272.364 285.547,272.821 285.547,273.336 DA5.44 ; v1(284.353,267.208) 284.652,267.208 DA5.8 ; DA5.35 290.442,277.241 290.652,277.241 v1@290.652,277.165 ; v1(290.585,277.165) v1@290.652,277.165 ; DD1.41 291.172,277.165 v1@290.652,277.165 ; C8.1 309.218,287.476 310.642,288.9 313.969,288.9 314.579,288.29 DA4.3
  Bottom Layer w0.254: v1(285.928,273.126) 286.41,273.126 287.782,271.755 287.782,271.323 v1(288.569,270.535)
  other v1: 288.036,261.899 287.35,264.312 281.965,271.348 332.613,273.456 288.163,282.829 278.841,283.286
  other v2: 304.775,262.712 315.697,265.405 301.904,266.192 305.232,266.624 304.063,271.475 312.649,276.022 313.715,280.949 296.113,285.293 307.111,285.877 292.075,287.401 314.249,291.236 317.729,291.287 289.433,302.692 301.32,305.892 302.692,311.328
GND_EXT: C1.2 C3.2 C4.2 C5.2 DA1.2 DA2.5 DA2.6 pad.0@280.797,304.927 pad.0@311.974,250.927 pad.0@343.151,304.927 R2.2 R3.2 VD2.3 X4.4 X4.5 X5.14 | length 242.8
  Top Layer w0.508: R2.2 299.593,316.13 DA1.2 299.593,319.329 299.847,319.583 301.396,319.583 303.479,317.5 C1.2
  Top Layer w0.762: C4.2 296.935,300.829 VD2.3 303.818,300.829 305.308,299.339 308.102,299.339 308.991,300.228 308.991,304.419 308.61,304.8 307.213,304.8 306.451,305.562 306.451,308.483 305.435,309.499 304.051,309.499 ; C3.2 296.291,313.08 298.298,315.087 R2.2 ; DA2.6 304.051,309.499 ; C1.2@304.051,317.36 304.051,316.484 ; pad.0@311.974,250.927 323.368,250.927 339.954,267.513 339.954,276.047 342.443,278.536 344.932,278.536 346.71,280.314 346.71,283.642 345.872,284.48 X4.4 X4.5 ; C5.2@315.697,314.731 C5.2 313.639,316.052 311.531,316.052 310.898,316.686 R3.2 304.253,316.686 304.051,316.484 ; 304.051,309.499 DA2.5 304.051,316.484
  Bottom Layer w0.762: X5.14 278.282,292.989 277.292,293.98 277.292,301.422 280.797,304.927 292.633,316.763 331.314,316.763 343.151,304.927 346.939,301.139 346.939,285.75 345.669,284.48 X4.4 X4.5
  other v2: 310.617,316.662 306.375,316.904
K=4: DA5.27 DD1.34 R9.1 VT1.1 | length 20.5
  Top Layer w0.254: DA5.27 293.559,274.701 293.658,274.701 DD1.34 296.325,277.368 297.307,277.368 297.942,276.733 297.942,275.59 298.704,274.828 301.371,274.828 302.419,273.78 VT1.1
K=8: DA5.28 DD1.35 R10.1 VT2.1 | length 13.1
  Top Layer w0.254: DA5.28 293.588,275.438 293.688,275.438 DD1.35 296.253,278.003 297.722,278.003 297.849,277.876 ; R10.1 297.849,280.423 297.849,277.876 ; VT2.1@299.024,275.685 298.64,276.069 298.64,277.085 297.849,277.876
NetC2_2: C2.2 DA1.3 R1.2 R2.1 | length 8.2
  Top Layer w0.762: 300.89,317.985 R2.1 301.017,314.96 R1.2 C2.2
NetC6_1: C6.1 DA3.2 | length 3.2
  Top Layer w0.762: C6.1 309.018,296.799 DA3.2
NetC6_2: C6.2 DA3.4 | length 3.3
  Top Layer w0.762: C6.2 309.218,294.259 DA3.4
NetC9_1: C9.1 DA4.6 R4.1 R6.2 | length 15.3
  Top Layer w0.254: R4.1 307.948,284.834 310.363,287.249 310.363,287.725 310.928,288.29 DA4.6
  Top Layer w0.762: C9.1 R6.2 303.403,284.707 R4.1
NetC9_2: C9.2 R6.1 R8.1 R11.1 R12.1 | length 10.2
  Top Layer w0.762: C9.2 R6.1 ; R12.1 R6.1 ; R11.1 R8.1 R6.1
NetC13_1: C13.1 DA4.2 R13.1 R14.2 | length 12.7
  Top Layer w0.762: R13.1 316.511,283.437 314.833,285.115 314.833,286.004 315.849,287.02 DA4.2 318.77,287.02 319.432,287.682 R14.2 C13.1
NetC13_2: C13.2 DA4.1 R14.1 R15.2 | length 9
  Top Layer w0.762: DA4.1 318.135,285.75 318.543,285.342 R14.1 ; R15.2 319.532,284.58 R14.1 ; C13.2 R14.1
NetDA1_1: DA1.1 L2.2 VD1.3 | length 9.3
  Top Layer w0.762: VD1.3 292.989,313.899 L2.2 295.611,315.423 DA1.1@298.52,318.332
NetDA2_8: DA2.8 L1.1 VD2.1 VD2.2 | length 8.6
  Top Layer w0.762: VD2.2 VD2.1 ; DA2.8 304.051,303.008 VD2.1 ; L1.1 306.499,302.929 VD2.1
NetHL1_2: HL1.2 R16.1 | length 4.8
  Top Layer w0.508: R16.1 346.481,299.339 HL1.2
NetHL2_2: HL2.2 R17.1 | length 5.7
  Top Layer w0.762: R17.1 346.837,275.082 348.361,276.606 HL2.2
NetR11_2: R11.2 VT1.3 | length 3.8
  Top Layer w0.254: R11.2 309.567,275.817 VT1.3
NetR12_2: R12.2 VT2.3 | length 4.3
  Top Layer w0.254: VT2.3@299.974,278.035 301.085,278.035 303.303,275.817 R12.2
NetVT3_3: VT3.3 X4.6 | length 4
  Top Layer w0.762: X4.6 345.916,287.02 VT3.3
NetVT4_3: VT4.3 X4.8 | length 3.2
  Top Layer w0.762: X4.8 347.821,289.56 VT4.3
NetX3_2: X3.2 X4.2 | length 20.1
  Bottom Layer w0.762: X3.2 342.773,278.892 344.805,280.924 X4.2
P_F: DA5.33 DD1.40 HL2.1 VT3.1 | length 81.9
  Top Layer w0.254: DA5.33 291.094,276.479 291.194,276.479 DD1.40 294.369,279.654 v1(295.275,279.654) ; 349.123,282.702 349.377,282.702 v1(350.012,282.067)
  Top Layer w0.762: HL2.1 348.361,281.94 349.123,282.702 350.298,283.877 VT3.1
  Bottom Layer w0.254: v1(295.275,279.654) 295.275,279.425 295.91,278.79 315.646,278.79 318.516,275.92 318.516,270.002 320.802,267.716 337.185,267.716 350.012,280.543 v1(350.012,282.067)
P_I: DA5.32 DD1.39 HL1.1 VT4.1 | length 90.3
  Top Layer w0.254: DA5.32 291.319,275.996 291.418,275.996 DD1.39 294.187,278.765 295.961,278.765 296.647,279.451 v1(296.647,279.705)
  Top Layer w0.762: HL1.1 348.361,292.481 v1(348.742,292.1) 349.123,291.719 349.123,289.912 VT4.1
  Bottom Layer w0.254: v1(296.647,279.705) 296.647,279.451 315.697,279.451 319.329,275.819 319.329,270.586 321.437,268.478 335.28,268.478 346.964,280.162 347.167,280.162 348.513,281.508 348.513,291.871 v1(348.742,292.1)
R\E\: DA5.26 DA6.2 DD1.33 | length 26.3
  Top Layer w0.254: DA5.26 293.733,274.168 293.832,274.168 DD1.33 296.144,276.479 296.545,276.479 296.621,276.403 v1(296.799,276.403) ; v1@309.499,269.494 v1(309.69,269.303) 309.88,269.113 DA6.2
  Bottom Layer w0.254: v1(296.799,276.403) 296.621,276.403 296.621,276.479 302.514,276.479 v1(309.69,269.303)
R\E\S\E\T\: C19.2 DA5.7 DD1.17 R18.2 X2.10 | length 73.9
  Top Layer w0.254: v1(283.21,268.605) 283.21,268.351 283.515,268.046 284.783,268.046 DA5.7 ; v1(294.386,264.541) 294.386,264.922 296.118,266.654 ; DD1.17 296.118,266.654 ; R18.2@300.101,270.991 300.101,268.886 C19.2 ; X2.10 323.324,256.979 328.447,262.103 328.447,262.661 327.05,264.058 305.638,264.058 302.235,267.462 301.217,267.462 C19.2 ; 296.118,266.654 298.196,268.732 C19.2
  Bottom Layer w0.254: v1(283.21,268.605) 282.956,268.605 283.147,268.414 282.575,267.843 282.575,265.811 287.528,260.858 289.941,260.858 293.624,264.541 v1(294.386,264.541)
RS485_N: DA6.7 R20.1 R21.2 X4.3 | length 30.1
  Top Layer w0.254: DA6.7 326.898,269.113 X4.3
RS485_P: DA6.6 R19.1 R20.2 X4.1 | length 29.6
  Top Layer w0.254: DA6.6 328.168,267.843 X4.1
RX: DA5.31 DA6.1 DD1.47 X4.9 | length 76.1
  Top Layer w0.254: DD1.47 291.451,281.686 v1(291.465,281.686) ; DA5.31 291.518,275.488 291.744,275.488 292.227,275.971 292.506,275.692 v1(292.506,275.641) ; v1(310.896,270.383) DA6.1 317.005,273.685 327.152,273.685 338.836,285.369 338.836,288.671 X4.9
  Bottom Layer w0.254: v1(291.465,281.686) 291.617,281.838 292.1,281.838 292.564,281.375 292.564,276.308 292.227,275.971 292.608,275.59 294.767,277.749 303.53,277.749 v1(310.896,270.383)
TCK: DA5.37 DD1.5 X2.4 | length 58.7
  Top Layer w0.254: DA5.37 287.282,276.588 v1(288.138,277.444) ; DD1.5 291.396,262.89 292.481,262.89 293.37,262.001 v1@295.275,262.001 ; v1@295.783,262.001 297.764,262.001 298.679,261.087 323.367,261.087 324.648,262.367 X2.4
  Bottom Layer w0.254: v1(288.138,277.444) 286.715,276.022 286.715,273.533 295.656,264.592 v1(295.656,261.874)
TDI: DA5.38 DD1.2 X2.8 | length 56.8
  Top Layer w0.254: DA5.38 287.807,275.318 287.807,273.99 v1(287.668,273.85) ; DD1.2 290.545,261.62 291.719,261.62 293.243,260.096 v1@295.91,260.096 ; v1(287.668,273.85) 287.668,273.647 287.63,273.609 287.528,273.71 v1(287.668,273.85)
  Bottom Layer w0.254: v1(287.668,273.85) 287.668,273.647 287.63,273.609 287.63,273.329 296.164,264.795 296.164,262.763 296.672,262.255 296.672,260.731 v1@296.101,260.159 ; v1(295.91,259.969) v1@296.101,260.159 ; X2.8 322.544,259.639 296.621,259.639 v1@296.101,260.159
TDO: DA5.39 DD1.1 X2.6 | length 54.6
  Top Layer w0.254: v1(286.385,271.907) 286.817,272.339 286.817,274.244 287.274,274.701 287.274,275.144 DA5.39 ; v1(288.29,265.811) 288.188,265.709 288.188,263.269 DD1.1 290.6,260.858 291.338,260.858 293.091,259.105 297.256,259.105 298.653,260.502 325.135,260.502 X2.6
  Bottom Layer w0.254: v1(286.385,271.907) 286.385,271.551 288.214,269.723 288.722,269.723 289.306,269.138 289.306,268.63 288.29,267.614 v1(288.29,265.811)
TMS: DA5.34 DD1.3 X2.2 | length 60.7
  Top Layer w0.254: v1@289.306,272.999 289.077,273.228 289.077,275.169 DA5.34 ; DD1.3 290.617,262.255 292.1,262.255 293.395,260.96 296.988,260.96 v1@297.452,260.495
  Bottom Layer w0.254: v1@289.306,272.999 289.306,272.339 296.672,264.973 296.672,263.017 297.452,262.237 297.452,260.495 297.612,260.655 320.726,260.655 324.234,264.163 X2.2
  other v1: 297.561,260.731 289.408,273.202
TX: DA5.30 DA6.4 DD1.46 X4.7 | length 78.1
  Top Layer w0.254: v1(289.433,278.486) 289.306,278.613 289.306,278.834 DD1.46 ; v1(290.728,272.567) 290.728,272.593 290.652,272.669 290.652,272.72 290.474,272.898 290.474,273.738 DA5.30 ; v1@307.467,267.665 308.559,266.573 DA6.4 315.214,266.573 315.722,267.081 315.722,270.891 317.678,272.847 328.092,272.847 339.979,284.734 339.979,287.274 X4.7
  Bottom Layer w0.254: v1(289.433,278.486) 289.433,275.615 290.83,274.218 290.83,272.415 295.275,267.97 306.908,267.97 v1(307.34,267.538)
pads on no net: DA2.1 DA2.2 DA2.3 DA3.1 DA3.7 DA5.2 DA5.3 DA5.4 DA5.5 DA5.6 DA5.10 DA5.11 DA5.12 DA5.17 DA5.18 DA5.19 DA5.20 DA5.21 DA5.22 DA5.29 DA5.42 DA5.43 DD1.4 DD1.14 DD1.16 DD1.18 DD1.20 DD1.21 DD1.22 DD1.23 DD1.24 DD1.25 DD1.26 DD1.27 DD1.29 DD1.30 DD1.36 DD1.37 DD1.38 DD1.43 DD1.44 DD1.45 DD1.48 DD1.49 DD1.50 DD1.51 DD1.52 DD1.53 DD1.56 DD1.57 DD1.58 DD1.59 DD1.60 DD1.61 DD1.62 DD1.63 DD1.64 DD1.65 DD1.66 DD1.67 DD1.73 DD1.74 DD1.75 DD1.76 DD1.77 DD1.78 DD1.79 DD1.81 DD1.82 DD1.85 DD1.86 DD1.87 DD1.88 DD1.89 DD1.90 DD1.91 DD1.92 DD1.93 DD1.94 DD1.95 DD1.98 DD1.99 DD1.100 X2.7

## Polygon pours and split planes (outlines as drawn)
GND on Bottom Layer "Bot Layer-gnd_ext" (solid, remove dead copper, pour order 1000): 273.558,294.553 275.336,302.173 280.289,310.301 287.147,317.286 294.012,321.731 304.292,325.287 310.796,326.176 316.992,325.287 323.596,324.271 328.93,321.731 335.153,318.556 340.868,312.841 345.059,307.253 346.456,305.348 348.742,301.411 349.885,295.95 350.774,289.981 350.774,283.758 349.885,277.154 347.853,271.058 344.678,265.851 341.249,261.152 336.169,256.199 329.946,252.516 325.755,250.357 321.056,248.706 315.722,247.69 309.118,247.563 301.371,249.214 296.352,251.246 291.338,253.532 286.893,256.834 281.94,261.787 278.13,267.121 275.717,271.947 273.685,278.551 273.05,284.774 272.771,289.966
GND on Top Layer "Top Layer-gnd_ext" (solid, remove dead copper, pour order 1000): 273.558,294.553 275.336,302.173 280.289,310.301 287.147,317.286 294.012,321.731 304.292,325.287 310.796,326.176 316.992,325.287 323.596,324.271 328.93,321.731 335.153,318.556 340.868,312.841 345.059,307.253 346.456,305.348 348.742,301.411 349.885,295.95 350.774,289.981 350.774,283.758 349.885,277.154 347.853,271.058 344.678,265.851 341.249,261.152 336.169,256.199 329.946,252.516 325.755,250.357 321.056,248.706 315.722,247.69 309.118,247.563 301.371,249.214 296.352,251.246 291.338,253.532 286.893,256.834 281.94,261.787 278.13,267.121 275.717,271.947 273.685,278.551 273.05,284.774 272.796,289.941

## Other copper
Top Layer:
  text "aig2_Head2 13.12.10" at 318.516,312.776 h1.52 r315

## Silkscreen, mask and mechanical layers (free items; w line width, h text height)
Top Overlay:
  text "+EGB" at 308.864,321.361 h1.52
  text "+12.6V" at 282.016,309.575 h1.52
  text "+3.3V" at 315.773,303.784 h1.52
  text "-3.3V" at 321.437,291.744 h1.52
  text "X5" at 293.599,287.325 h1.52
  text "EMU-" at 326.111,284.251 h1.52
  text "EMU+" at 326.542,271.653 h1.52
Mechanical 1:
  circle w0.254: c311.974,286.927 r40